# Altium PCB PCB1.PcbDoc
Units mm, origin at the board's own origin, x right, y up, seen from the top; angles counter-clockwise.
Board outline 110 x 69 mm, 2 copper layers (Top Layer, Bottom Layer), stack 1.671 mm thick; 62 components, 63 nets, 264 pads, 198 vias.
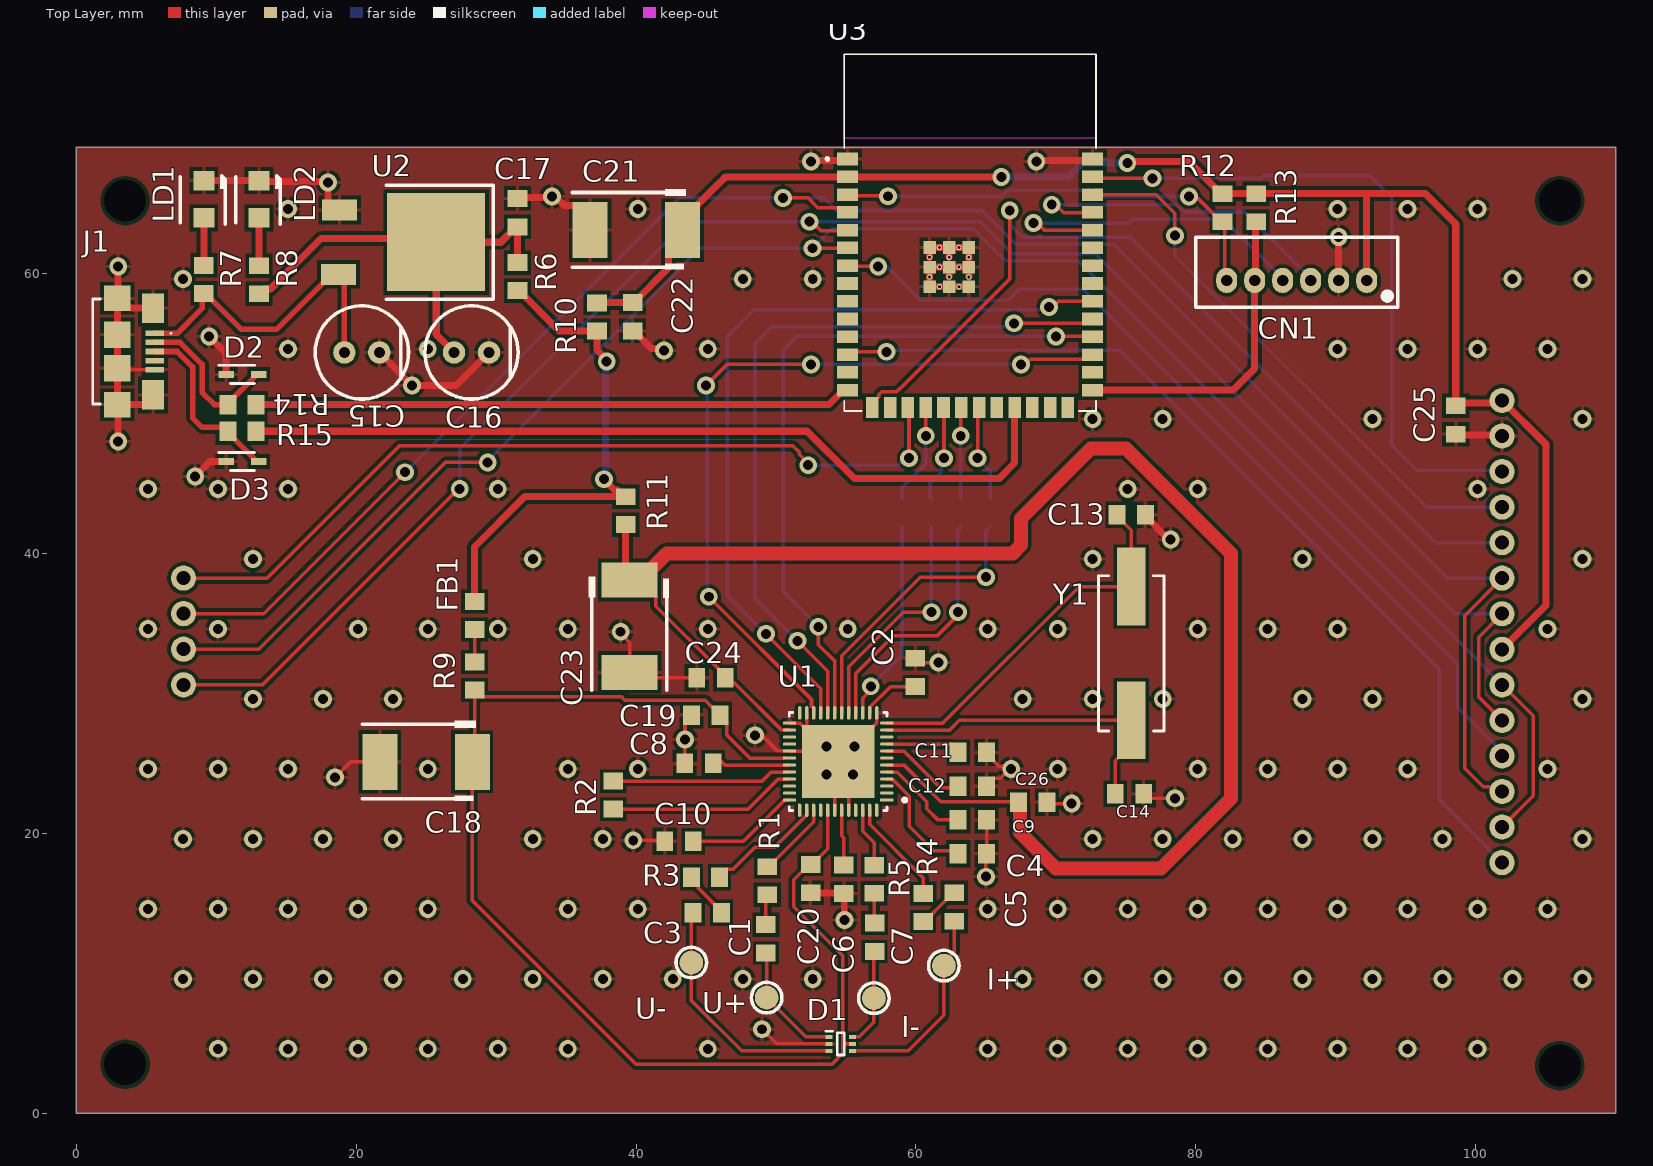
[diagram p0: Top Layer view]
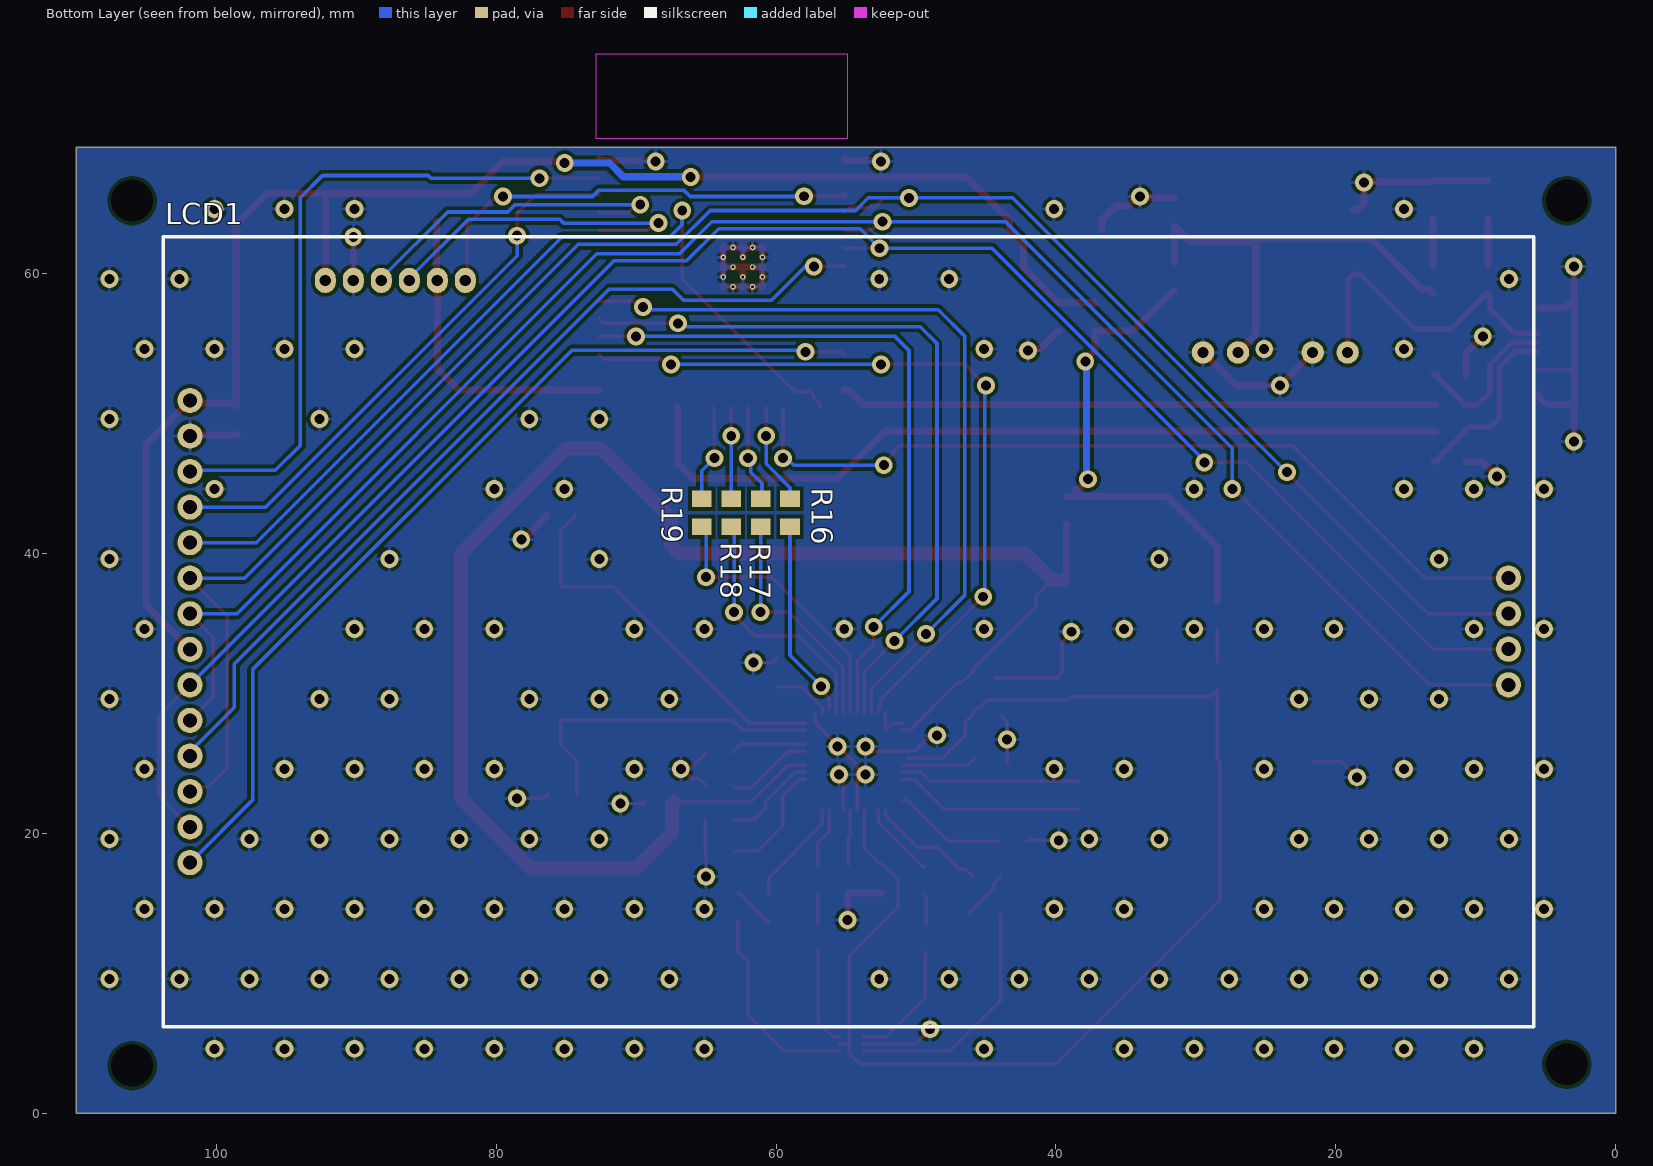
[diagram p1: Bottom Layer view, seen from below]
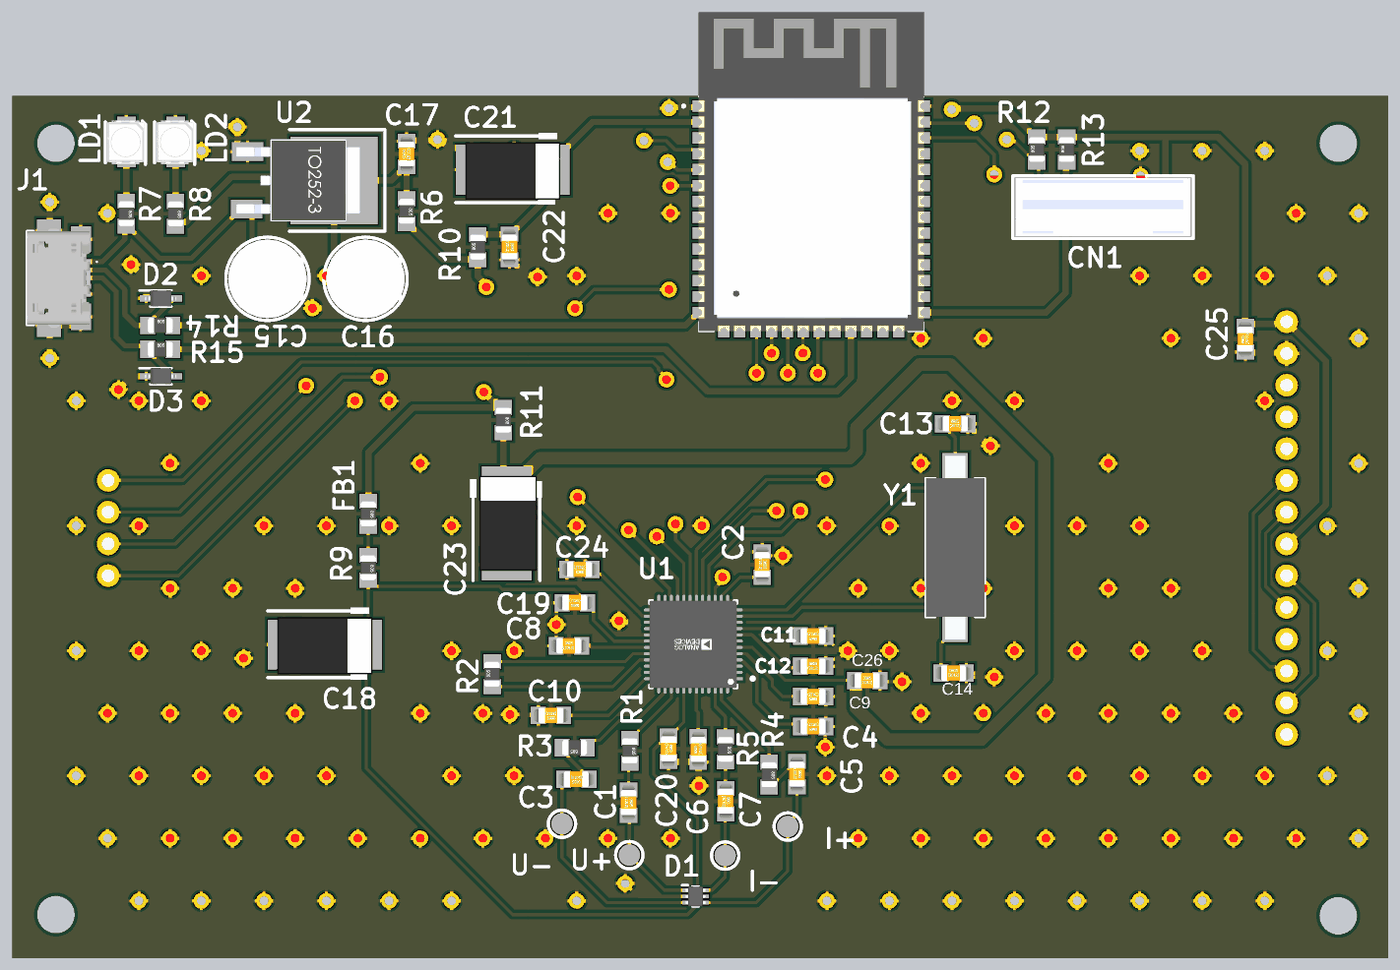
[diagram p2: 3D render of the assembled board from above, using the file's embedded part models]
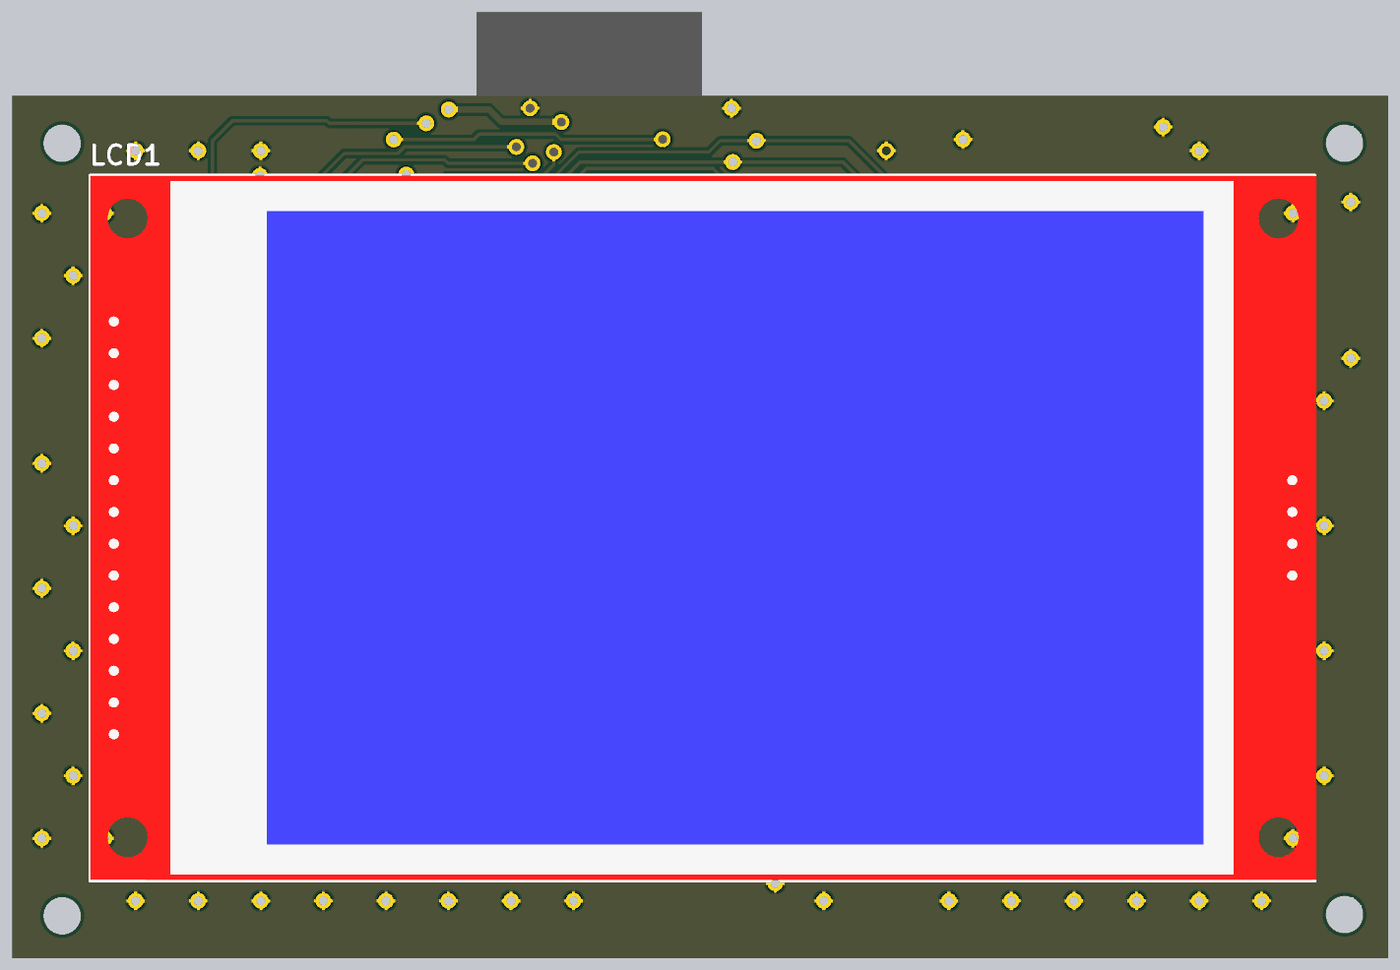
[diagram p3: 3D render of the assembled board from below, using the file's embedded part models]

## Layer stack, top to bottom
Top Solder: solder mask 0.0102, Solder Resist, Dk 3.5
Top Layer: signal copper 0.0356
Dielectric 1: dielectric 1.6, FR-4, Dk 4.8
Bottom Layer: signal copper 0.0356
Bottom Solder: solder mask 0.0102, Solder Resist, Dk 3.5

## Board outline
0,0 0,69 110,69 110,0

## Design rules (kind name [scope] priority, off if disabled: settings)
AssemblyTestPointUsage [All] p1: isadvanced=TRUE
AssemblyTestpoint [All] p1: isadvanced=TRUE testpointundercomponent=TRUE minsize=1.016 maxsize=2.54 preferedsize=1.524 minholesize=0 maxholesize=1.016 preferedholesize=0.813 testpointgrid=0.025 usegrid=TRUE gridtolerance=0 allowsidetop=TRUE allowsidebottom=TRUE
Clearance Clearance_2 [InNamedPolygon('GND_L01_P001') Or InNamedPolygon('GND_L02_P000')] p1: isadvanced=TRUE gap=0.254 ignorepadtopadclearanceinfootprint=FALSE
Clearance Clearance_1 [OnMid vs InNetClass('AD5941') And OnMid] p2: gap=0.1 ignorepadtopadclearanceinfootprint=FALSE sourcerule=52 cellrowname=All cellrowtype=0 cellcolname=AD5941 cellcoltype=2 innerlayers=TRUE
Clearance Clearance_2 [(ExistsOnLayer('Top Layer') Or ExistsOnLayer('Bottom Layer')) vs InNetClass('AD5941') And (ExistsOnLayer('Top Layer') Or ExistsOnLayer('Bottom Layer'))] p3: gap=0.1 ignorepadtopadclearanceinfootprint=FALSE sourcerule=52 cellrowname=All cellrowtype=0 cellcolname=AD5941 cellcoltype=2 outerlayers=TRUE
Clearance Clearance_3 [ vs InNetClass('AD5941')] p4: gap=0.254 ignorepadtopadclearanceinfootprint=FALSE sourcerule=52 cellrowname=All cellrowtype=0 cellcolname=AD5941 cellcoltype=2
Clearance Clearance_1 [InNetClass('USB') And OnMid vs OnMid] p5: gap=0.1 ignorepadtopadclearanceinfootprint=FALSE sourcerule=52 cellrowname=USB cellrowtype=2 cellcolname=All cellcoltype=0 innerlayers=TRUE
Clearance Clearance_2 [InNetClass('USB') And (ExistsOnLayer('Top Layer') Or ExistsOnLayer('Bottom Layer')) vs (ExistsOnLayer('Top Layer') Or ExistsOnLayer('Bottom Layer'))] p6: gap=0.1 ignorepadtopadclearanceinfootprint=FALSE sourcerule=52 cellrowname=USB cellrowtype=2 cellcolname=All cellcoltype=0 outerlayers=TRUE
Clearance Clearance_3 [InNetClass('USB')] p7: gap=0.254 ignorepadtopadclearanceinfootprint=FALSE sourcerule=52 cellrowname=USB cellrowtype=2 cellcolname=All cellcoltype=0
Clearance Clearance_1 [InNetClass('USB') And OnMid vs InNetClass('USB') And OnMid] p8: gap=0.1 ignorepadtopadclearanceinfootprint=FALSE sourcerule=52 cellrowname=USB cellrowtype=2 cellcolname=USB cellcoltype=2 innerlayers=TRUE
Clearance Clearance_2 [InNetClass('USB') And (ExistsOnLayer('Top Layer') Or ExistsOnLayer('Bottom Layer')) vs InNetClass('USB') And (ExistsOnLayer('Top Layer') Or ExistsOnLayer('Bottom Layer'))] p9: gap=0.1 ignorepadtopadclearanceinfootprint=FALSE sourcerule=52 cellrowname=USB cellrowtype=2 cellcolname=USB cellcoltype=2 outerlayers=TRUE
Clearance Clearance_3 [InNetClass('USB') vs InNetClass('USB')] p10: gap=0.254 ignorepadtopadclearanceinfootprint=FALSE sourcerule=52 cellrowname=USB cellrowtype=2 cellcolname=USB cellcoltype=2
Clearance Clearance_1 [OnMid vs OnMid] p11: gap=0.254 ignorepadtopadclearanceinfootprint=FALSE sourcerule=52 cellrowname=All cellrowtype=0 cellcolname=All cellcoltype=0 innerlayers=TRUE
Clearance Clearance_2 [(ExistsOnLayer('Top Layer') Or ExistsOnLayer('Bottom Layer')) vs (ExistsOnLayer('Top Layer') Or ExistsOnLayer('Bottom Layer'))] p12: gap=0.254 ignorepadtopadclearanceinfootprint=FALSE sourcerule=52 cellrowname=All cellrowtype=0 cellcolname=All cellcoltype=0 outerlayers=TRUE
Clearance [All] p13: gap=0.254 ignorepadtopadclearanceinfootprint=FALSE ismatrix=TRUE miname0="All Differential Pairs" mitype0=4 miname1=AD5941 mitype1=2 miname2=USB mitype2=2
ComponentClearance [All] p1: isadvanced=TRUE gap=0.254 collisioncheckmode=3 verticalgap=0.254 showdistances=FALSE
FabricationTestPointUsage [All] p1: isadvanced=TRUE valid=0 allowmultiple=FALSE
FabricationTestpoint [All] p1: isadvanced=TRUE side=3 testpointundercomponent=TRUE minsize=1.016 maxsize=2.54 preferedsize=1.524 minholesize=0 maxholesize=1.016 preferedholesize=0.813 testpointgrid=0.025 allowsidetop=TRUE allowsidebottom=TRUE usegrid=TRUE gridtolerance=0
FanoutControl Fanout_BGA [IsBGA] p1: isadvanced=TRUE bgadir=Out bgaviamode=Centered fanoutstyle=Auto fanoutdirection=Alternating viagrid=0.025 // Fanout_BGA (Default Rule)
FanoutControl Fanout_LCC [IsLCC] p2: isadvanced=TRUE bgadir=Out bgaviamode=Centered fanoutstyle=Auto fanoutdirection=Alternating viagrid=0.025 // Fanout_LCC (Default Rule)
FanoutControl Fanout_SOIC [IsSOIC] p3: isadvanced=TRUE bgadir=Out bgaviamode=Centered fanoutstyle=Auto fanoutdirection=Alternating viagrid=0.025 // Fanout_SOIC (Default Rule)
FanoutControl Fanout_Small [(CompPinCount < 5)] p4: isadvanced=TRUE bgadir=Out bgaviamode=Centered fanoutstyle=Auto fanoutdirection=OutThenIn viagrid=0.025 // Fanout_Small (Default Rule)
FanoutControl Fanout_Default [All] p5: isadvanced=TRUE bgadir=Out bgaviamode=Centered fanoutstyle=Auto fanoutdirection=Alternating viagrid=0.025 // Fanout_Default (Default Rule)
Height [All] p1: isadvanced=TRUE minheight=0 maxheight=25.4 prefheight=12.7
HoleSize [All] p1: isadvanced=TRUE absolutevalues=TRUE maxlimit=10 minlimit=0.025 maxpercent=80.000 minpercent=20.000
HoleToHoleClearance [All] p1: isadvanced=TRUE gap=0.254 allowstackedmicrovias=TRUE
LayerPairs [All] p1: isadvanced=TRUE enforce=TRUE
MinimumSolderMaskSliver [All] p1: isadvanced=TRUE minsoldermaskwidth=0.075
NetAntennae [All] p1: isadvanced=TRUE netantennaetolerance=0
PasteMaskExpansion [All] p1: isadvanced=TRUE expansion=0
PlaneClearance [All] p1: isadvanced=TRUE clearance=0.508
PlaneConnect [All] p1: isadvanced=TRUE planeconnectstyle=Relief reliefexpansion=0.508 reliefentries=4 reliefconductorwidth=0.254 reliefairgap=0.254
PolygonConnect [All] p1: connectstyle=Relief reliefconductorwidth=0.254 reliefentries=4 polygonreliefangle="90 Angle" airgapwidth=0.254
RoutingCorners [All] p1: isadvanced=TRUE cornerstyle=45-Degree minsetback=2.54 maxsetback=2.54
RoutingPriority [All] p1: isadvanced=TRUE routingpriority=0
RoutingVias [All] p1: holewidth=0.711 width=1.27 viastyle="Through Hole" minholewidth=0.711 minwidth=1.27 maxholewidth=0.711 maxwidth=1.27
ShortCircuit [All] p1: isadvanced=TRUE allowed=FALSE
SilkToSilkClearance [All] p1: isadvanced=TRUE silktosilkclearance=0.1
SilkToSolderMaskClearance [IsPad] p1: isadvanced=TRUE minsilkscreentomaskgap=0.1 clearancetoexposedcopper=TRUE
SolderMaskExpansion [All] p1: isadvanced=TRUE expansion=0.102 istentingtop=FALSE
SupplyNets "Schematic Supply Nets_5" [InNet('GND')] p1: isadvanced=TRUE voltage=0.000
SupplyNets "Schematic Supply Nets_4" [InNet('AVDD_AD')] p2: isadvanced=TRUE voltage=0.000
SupplyNets "Schematic Supply Nets_3" [InNet('DVDD_AD')] p3: isadvanced=TRUE voltage=0.000
SupplyNets "Schematic Supply Nets_2" [InNet('+5')] p4: isadvanced=TRUE voltage=0.000
SupplyNets "Schematic Supply Nets_1" [InNet('+3.3')] p5: isadvanced=TRUE voltage=0.000
SupplyNets "Schematic Supply Nets" [InNet('DVDD')] p6: isadvanced=TRUE voltage=0.000
UnRoutedNet [All] p1: isadvanced=TRUE
UnpouredPolygon [All] p1: isadvanced=TRUE
Width [All] p1: maxlimit=1 minlimit=0.1 preferedwidth=0.254 minimp=50.000000 maximp=50.000000 favimp=50.000000
4 further rules are at their usual default settings.

## Classes and differential pairs
net class USB: +5 NetD2_2 NetD3_2
net class AD5941: AD_CS AD_GP0 AD_GP1 AD_GP2 AD_MISO AD_MOSI AD_RESET_N AD_SCLK AIN0 AIN1 AIN3 AVDD_AD AVDD_REG CE0 DE0 DVDD_AD DVDD_REG1V8 GND RCAL0 RCAL1 VBIAS VBIAS_CAP VREF_1V8 VREF_2V5 VZERO XTAL0 XTAL1

## Components (designator, comment, footprint, x,y, rotation, side; value= is the part's Value field where it differs from the comment)
C1 "CAP SMD CER 10UF 50V 1206" CAP0805OK 49.274,12.462 r270 top value=10uF
C2 "CAP SMD CER 470NF 100V 0805" CAP0805OK 59.961,31.496 r270 top value=470nF
C3 "CAP SMD CER 10UF 50V 1206" CAP0805OK 45.09,14.319 r180 top value=10uF
C4 "CAP SMD CER 470NF 100V 0805" CAP0805OK 64.025,18.542 r180 top value=470nF
C5 "CAP SMD CER 10UF 50V 1206" CAP0805OK 62.735,14.734 r270 top value=10uF
C6 "CAP SMD CER 4.7UF 50V 0805" CAP0805OK 54.85,16.716 r90 top value=4.7uF
C7 "CAP SMD CER 10UF 50V 1206" CAP0805OK 57.04,12.573 r270 top value=10uF
C8 "CAP SMD CER 470NF 100V 0805" CAP0805OK 44.5,25 r0 top value=470nF
C9 "CAP SMD CER 470NF 100V 0805" CAP0805OK 64.025,20.955 r180 top value=470nF
C10 "CAP SMD CER 100NF 25V 0805" CAP0805OK 43.07,19.431 r180 top value=100nF
C11 "CAP SMD CER 1UF 10V 0805" CAP0805OK 64.025,25.781 r180 top value=1uF
C12 "CAP SMD CER 100NF 25V 0805" CAP0805OK 64.025,23.368 r0 top value=100nF
C13 "CAP SMD CER 6.8PF 25V 0805" CAP0805OK 75.38,42.759 r0 top value=6.8pF
C14 "CAP SMD CER 100NF 25V 0805" CAP0805OK 75.253,22.82 r0 top value=100nF
C15 "CAP PTH ELE 100UF 25V" CAPELETR11X6.3X2.5 19.159,54.357 r0 top value=100uF
C16 "CAP PTH ELE 100UF 25V" CAPELETR11X6.3X2.5 26.993,54.357 r0 top value=100uF
C17 "CAP SMD CER 100NF 25V 0805" CAP0805OK 31.53,64.345 r90 top value=100nF
C18 "CAP SMD TAN 10UF 25V 2312" CAP2312 25,25 r180 top value=10uF
C19 "CAP SMD CER 100NF 25V 0805" CAP0805OK 44.975,28.448 r180 top value=100nF
C20 "CAP SMD CER 100NF 25V 0805" CAP0805OK 52.468,16.764 r270 top value=100nF
C21 "CAP SMD TAN 10UF 25V 2312" CAP2312 40.022,62.992 r180 top value=10uF
C22 "CAP SMD CER 100NF 25V 0805" CAP0805OK 39.751,56.911 r270 top value=100nF
C23 "CAP SMD TAN 10UF 25V 2312" CAP2312 39.641,34.798 r270 top value=10uF
C24 "CAP SMD CER 100NF 25V 0805" CAP0805OK 45.356,31.115 r180 top value=100nF
C25 "CAP SMD CER 100NF 25V 0805" CAP0805OK 98.569,49.53 r90 top value=100nF
C26 "CAP SMD CER 100NF 25V 0805" CAP0805OK 68.343,22.225 r0 top value=100nF
CN1 "CN MAC 6 VIAS 180º 2.54MM" PHMC4-06 92.2,59.5 r180 top
D1 "SP3004-04XTG" SOTFL50P160X60-6N 54.627,4.953 r0 top
D2 "SD05C-7" SOD2513X120N 11.882,52.789 r0 top
D3 "SD05C-7" SOD2513X120N 11.882,46.566 r0 top
FB1 "FERRITE BEAD SMD 600R 0805" RES0805OK 28.465,35.56 r270 top value="FER BEAD 600R"
I+ "I+" "TEST POINT" 61.993,10.541 r180 top
I- "I-" "TEST POINT" 56.991,8.22 r180 top
J1 "microUSB" MICROUSB 3.738,54.426 r270 top
LCD1 "Display 3,5\"" "DISPLAY_3.5\"_SPI_480X320" 5.771,62.607 r0 bottom locked
LD1 "PLCC-2" PLCC-2 9.126,65.288 r90 top
LD2 "PLCC-2" PLCC-2 13.063,65.288 r90 top
R1 "RES SMD 1K6 0.1% 0805" RES0805OK 49.37,16.605 r270 top value=1K
R2 "RES SMD 1K 1% 0805" RES0805OK 38.371,22.733 r90 top value=1K
R3 "RES SMD 1K6 0.1% 0805" RES0805OK 44.963,16.859 r180 top value=1K
R4 "RES SMD 10R 1% 0805" RES0805OK 60.506,14.696 r270 top value=10R
R5 "RES SMD 10R 1% 0805" RES0805OK 57.009,16.716 r270 top value=10R
R6 "RES SMD 0R 5% 0805" RES0805OK 31.53,59.773 r270 top value=0R
R7 "RES SMD 1K 1% 0805" RES0805OK 9.126,59.573 r270 top value=470
R8 "RES SMD 1K 1% 0805" RES0805OK 13.063,59.557 r270 top value=470
R9 "RES SMD 0R 5% 0805" RES0805OK 28.465,31.242 r270 top value=0R
R10 "RES SMD 0R 5% 0805" RES0805OK 37.211,56.895 r90 top value=0R
R11 "RES SMD 0R 5% 0805" RES0805OK 39.26,43.053 r270 top value=0R
R12 "RES SMD 10K 1% 0805" RES0805OK 81.9,64.7 r90 top value=10K
R13 "RES SMD 10K 1% 0805" RES0805OK 84.3,64.7 r90 top value=10K
R14 "RES SMD 100K 1% 0805" RES0805OK 11.841,50.63 r0 top value=100K
R15 "RES SMD 100K 1% 0805" RES0805OK 11.841,48.725 r0 top value=100K
R16 "RES SMD 10 1% 0805" res0805ok 59,42.9 r270 bottom value=10
R17 "RES SMD 10 1% 0805" res0805ok 61.1,42.9 r270 bottom value=10
R18 "RES SMD 10 1% 0805" res0805ok 63.2,42.9 r270 bottom value=10
R19 "RES SMD 10 1% 0805" res0805ok 65.3,42.9 r270 bottom value=10
U1 "AD5941BCPZ" FP-CP-48-4-IPC_A 54.44,25.126 r180 top
U2 "LM1117" TO252-3 25.723,62.231 r270 top
U3 "IC SMD ESP32-S3-WROOM-1-N4R2" XCVR_ESP32-S3-WROOM-1-N4R2 63.871,62.915 r0 top
U+ "U+" "TEST POINT" 49.331,8.257 r180 top
U- "U-" "TEST POINT" 43.947,10.763 r180 top
Y1 "XTAL SMD 16MHZ" "XTAL SMD 16MHZ" 75.38,32.853 r90 top

## Footprints (in the part's own frame and the unit in brackets; to place one, negate y for a bottom-side part, rotate by r counter-clockwise, add the part's x,y. Pads: shape width x height; smd on the part's side, far side on the other; paste and mask are expansions set on the pad)
CAP0805OK [mm]
  rect 1.2x1.4 smd: 1(-1.016,0) 2(1.016,0)
  body extent -1.4,-0.62 1.4,0.62, height 0.8
CAP2312 [mm]
  rect 2.5x4 smd: 1(-3.3,-0.1) 2(3.3,-0.1)
  silkscreen extent -3.56,-3.05 4.57,2.7, body extent -3.8,-2.3 3.8,2.3, height 3.1
CAPELETR11X6.3X2.5 [mm]
  round 1.6 hole 0.8: 1(0,0) 2(2.5,0)
  silkscreen extent -2.08,-3.33 4.58,3.33, body extent -1.89,-3.15 4.39,3.13, height 11.2
"DISPLAY_3.5\"_SPI_480X320" [mm]
  round 1.8 hole 1: 1(96.1,11.68) 2(96.1,14.22) 3(96.1,16.76) 4(96.1,19.3) 5(96.1,21.84) 6(96.1,24.38) 7(96.1,26.92) 8(96.1,29.46) 9(96.1,32) 10(96.1,34.54) 11(96.1,37.08) 12(96.1,39.62) 13(96.1,42.16) 14(96.1,44.7) 15(1.9,31.995) 16(1.9,29.455) 17(1.9,26.915) 18(1.9,24.375)
  silkscreen extent 0.1,-0.03 98,56.43, body extent 0,0 98,56.34, height 11.7
FP-CP-48-4-IPC_A [mm]
  rect 0.961x0.239 smd paste+0 mask+0: 1(-3.476,2.75)
  rrect100% 0.961x0.239 smd paste+0 mask+0: 2(-3.476,2.25) 3(-3.476,1.75) 4(-3.476,1.25) 5(-3.476,0.75) 6(-3.476,0.25) 7(-3.476,-0.25) 8(-3.476,-0.75) 9(-3.476,-1.25) 10(-3.476,-1.75) 11(-3.476,-2.25) 12(-3.476,-2.75) 25(3.476,-2.75) 26(3.476,-2.25) 27(3.476,-1.75) 28(3.476,-1.25) 29(3.476,-0.75) 30(3.476,-0.25) 31(3.476,0.25) 32(3.476,0.75) 33(3.476,1.25) 34(3.476,1.75) 35(3.476,2.25) 36(3.476,2.75)
  rrect100% 0.239x0.961 smd paste+0 mask+0: 13(-2.75,-3.476) 14(-2.25,-3.476) 15(-1.75,-3.476) 16(-1.25,-3.476) 17(-0.75,-3.476) 18(-0.25,-3.476) 19(0.25,-3.476) 20(0.75,-3.476) 21(1.25,-3.476) 22(1.75,-3.476) 23(2.25,-3.476) 24(2.75,-3.476) 37(2.75,3.476) 38(2.25,3.476) 39(1.75,3.476) 40(1.25,3.476) 41(0.75,3.476) 42(0.25,3.476) 43(-0.25,3.476) 44(-0.75,3.476) 45(-1.25,3.476) 46(-1.75,3.476) 47(-2.25,3.476) 48(-2.75,3.476)
  rect 5.2x5.2 smd paste-1000 mask+0: 49(0,0)
  silkscreen extent -4.88,-3.5 3.5,3.5, body extent -4.46,-4.46 4.46,4.46, height 0.25
MICROUSB [mm]
  rect 0.4x1.35 smd: 1(-1.3,1.875) 2(-0.65,1.875) 3(0,1.875) 4(0.65,1.875) 5(1.3,1.875)
  rect 2.1x1.6 smd: MP1(-3.1,1.75) MP2(3.1,1.75)
  rect 1.8x1.9 smd: MP3(-3.8,-0.8) MP6(3.8,-0.8)
  rect 1.9x1.9 smd: MP4(-1.2,-0.8) MP5(1.2,-0.8)
  silkscreen extent -3.75,-2.55 3.75,3.08, body extent -3.96,-2.55 3.96,2.55, height 2.77
PHMC4-06 [mm]
  oval 1.5x1.8 hole 0.8: 1(0,0) 2(2,0) 3(4,0) 4(6,0) 5(8,0) 6(10,0)
  silkscreen extent -2.21,-3.1 12.22,1.91, body extent -2,-2.93 12,1.72, height 6.02
PLCC-2 [mm]
  rect 1.4x1.5 smd: 1(-1.321,0) 2(1.346,0)
  silkscreen extent -1.78,-1.52 1.7,1.68, body extent -1.75,-1.43 1.75,1.53, height 1.75
RES0805OK [mm]
  rect 1.2x1.4 smd: 1(-1,0) 2(1,0)
  body extent -1,-0.62 1,0.63, height 0.78
res0805ok [mm]
  rect 1.2x1.4 smd: 1(-1,0) 2(1,0)
  body extent -1,-0.62 1,0.63, height 0.78
SOD2513X120N [mm]
  rect 1.075x0.5 smd: 1(-1.162,0) 2(1.162,0)
  silkscreen extent -1.7,-0.65 0.85,0.65, body extent -1.25,-0.65 1.25,0.65, height 1.2
SOTFL50P160X60-6N [mm]
  rect 0.475x0.3 smd: 1(-0.838,0.5) 2(-0.838,0) 3(-0.838,-0.5) 4(0.838,-0.5) 5(0.838,0) 6(0.838,0.5)
  silkscreen extent -1.07,-0.8 0.25,0.9, body extent -0.8,-0.8 0.8,0.8, height 0.6
"TEST POINT" [mm]
  round 1.7 smd: 0(0,0)
  silkscreen extent -1.09,-1.09 1.09,1.09
TO252-3 [mm]
  rect 1.5x2.5 smd: 1(-2.3,-6.9) 3(2.3,-6.985)
  rect 7x7 smd: 2(0,0)
  silkscreen extent -4.06,-3.56 4.06,4.06, body extent -3.29,-7.81 3.29,2.1, height 2.29
XCVR_ESP32-S3-WROOM-1-N4R2 [mm]
  rect 1.5x0.9 smd: 1(-8.75,5.26) 2(-8.75,3.99) 3(-8.75,2.72) 4(-8.75,1.45) 5(-8.75,0.18) 6(-8.75,-1.09) 7(-8.75,-2.36) 8(-8.75,-3.63) 9(-8.75,-4.9) 10(-8.75,-6.17) 11(-8.75,-7.44) 12(-8.75,-8.71) 13(-8.75,-9.98) 14(-8.75,-11.25) 27(8.75,-11.25) 28(8.75,-9.98) 29(8.75,-8.71) 30(8.75,-7.44) 31(8.75,-6.17) 32(8.75,-4.9) 33(8.75,-3.63) 34(8.75,-2.36) 35(8.75,-1.09) 36(8.75,0.18) 37(8.75,1.45) 38(8.75,2.72) 39(8.75,3.99) 40(8.75,5.26)
  rect 0.9x1.5 smd: 15(-6.985,-12.5) 16(-5.715,-12.5) 17(-4.445,-12.5) 18(-3.175,-12.5) 19(-1.905,-12.5) 20(-0.635,-12.5) 21(0.635,-12.5) 22(1.905,-12.5) 23(3.175,-12.5) 24(4.445,-12.5) 25(5.715,-12.5) 26(6.985,-12.5)
  rect 0.9x0.9 smd: 41_1(-1.5,-2.46) 41_2(-2.9,-2.46) 41_3(-0.1,-2.46) 41_4(-2.9,-3.86) 41_5(-1.5,-3.86) 41_6(-0.1,-3.86) 41_7(-2.9,-1.06) 41_8(-1.5,-1.06) 41_9(-0.1,-1.06)
  round 0.4 hole 0.2 mask+0: 41_10(-1.5,-1.76) 41_11(-2.9,-1.76) 41_12(-0.1,-1.76) 41_13(-2.9,-3.16) 41_14(-1.5,-3.16) 41_15(-0.1,-3.16) 41_16(-2.2,-1.06) 41_17(-0.8,-1.06) 41_18(-2.2,-2.46) 41_19(-0.8,-2.46) 41_20(-2.2,-3.86) 41_21(-0.8,-3.86)
  Keep-Out Layer region: 9,6.75 -9,6.75 -9,12.75 9,12.75
  Keep-Out Layer region: 9,6.75 -9,6.75 -9,12.75 9,12.75
  silkscreen extent -10.3,-12.75 9,12.75, body extent -9,-12.75 9,12.75, height 3.25
"XTAL SMD 16MHZ" [mm]
  rect 5.55x2.05 smd: 1(-4.775,0) 2(4.775,0)
  silkscreen extent -5.55,-2.35 5.55,2.35, body extent -7.34,-2.35 7.34,2.35, height 4.6

## Part data
C1 C3 C5 C7: library part "CAP SMD CER 10UF 10V 0805", "Multilayer Ceramic Capacitors MLCC - SMD/SMT 10 uF 10 VDC 10% 0805 X7R", Tolerance=20%, Voltage=50V, COD. CRISTOFOLI=EMP.00322, List="CAP CER 10UF 50V X5R 1206/UMK316BBJ106ML-T/Generic", Type=CERAMIC
C2 C4 C8 C9: Tolerance=10%, Voltage=100V, COD. CRISTOFOLI=EMP.00245, List="CAP CER 0.47UF 100V 10% X7R 0805/GRM21BR72A474KA73L/Murata Electronics North America", Type=CERAMIC
C6: Tolerance=10%, Voltage=50V, COD. CRISTOFOLI=EMP.00333, List="CAP CER 4.7UF 50V X5R 0805/CL21A475KBQNNNE/Samsung", Type=CERAMIC
C10 C12 C14 C17 C19 C20 C22 C24 C25 C26: Tolerance=10%, Voltage=25V, COD. CRISTOFOLI=EMP.00094, List="CAP CER 0.1UF 25V 10% X7R 0805/CGJ4J2X7R1E104K125AA/TDK", Type=CERAMIC
C11: Tolerance=20%, Voltage=10V, COD. CRISTOFOLI=EMP.00209, List="CAP- SMD/SMT X7R 0805 10V 1uF 20%/LMK212BJ105MG-T/Taiyo Yuden", Type=CERAMIC
C13: library part "CAP SMD CER 100NF 25V 0805", Tolerance=10%, Voltage=25V, COD. CRISTOFOLI=EMP.00094, List="CAP CER 0.1UF 25V 10% X7R 0805/CGJ4J2X7R1E104K125AA/TDK", Type=CERAMIC
C15 C16 C18 C21 C23: Tolerance=20%, Voltage=25V
  C15 C16: COD. CRISTOFOLI=EMP.00025, List="CAP ALUM 100UF 25V 20% RADIAL - ECA-1EM101I", Type="ALUMINIUM ELETROLITHIC"
  C18 C21 C23: COD. CRISTOFOLI=EMP.00040, List="CAP TANT 10UF 25V 20% 2312 / 293D106X0025C2TE3 / Vishay", Type=TANTALUM
CN1: "gravação micro", Manufacturer=METALTEX, Manufacturer Part Number=PHMC4-06, COD. CRISTOFOLI=EMP.00436, List="Barra de pinos Macho 180° / BPSC-03 / metaltex"
D1: "TVS Diode (Uni-directional)", Manufacturer_Name=LITTELFUSE, Mouser Part Number=576-SP3004-04XTG, Arrow Part Number=SP3004-04XTG, Arrow Price/Stock=https://www.arrow.com/en/products/sp3004-04xtg/littelfuse?region=nac, Datasheet Link=https://m.littelfuse.com/~/media/electronics/datasheets/tvs_diode_arrays/littelfuse_tvs_diode_array_sp3004_datasheet.pdf.pdf, Height=0.6mm, Manufacturer_Part_Number=SP3004-04XTG, Mouser Price/Stock=https://www.mouser.co.uk/ProductDetail/Littelfuse/SP3004-04XTG?qs=trbuaetfxXQ7JjseAkJ3Ww%3D%3D
D2 D3: "TVS Diode (Bi-directional)", Manufacturer_Name="Diodes Incorporated", Mouser Part Number=621-SD05C-7, Arrow Part Number=SD05C-7, Arrow Price/Stock=https://www.arrow.com/en/products/sd05c-7/diodes-incorporated?utm_currency=USD&region=nac, Datasheet Link=https://www.diodes.com//assets/Datasheets/SD05C.pdf, Height=1.2mm, Manufacturer_Part_Number=SD05C-7, Mouser Price/Stock=https://www.mouser.co.uk/ProductDetail/Diodes-Incorporated/SD05C-7?qs=lQAVKuKFhkJ%252Bbajm903DcQ%3D%3D
I+ I- U+ U-: library part "TEST POINT"
J1: "Connector", Arrow Part Number=10118192-0002LF, Manufacturer_Name="Amphenol Communications Solutions", Arrow Price/Stock=https://www.arrow.com/en/products/10118192-0002lf/amphenol-fci?utm_currency=USD&region=nac, Datasheet Link=https://cdn.amphenol-cs.com/media/wysiwyg/files/drawing/10118192.pdf, Height=3.08mm, Manufacturer_Part_Number=10118192-0002LF
LCD1: library part "Display 3,5\" SPI", "Display TFT SPI 480X320", COD. CRISTOFOLI=EMP.00435, Datasheet=http://www.lcdwiki.com/res/MSP3520/3.5inch_SPI_Module_MSP3520_User_Manual_EN.pdf, Documentações=http://www.lcdwiki.com/3.5inch_SPI_Module_ILI9488_SKU:MSP3520, List="Display TFT 3.5\" SPI 480X320 MSP3520"
LD1 LD2: library part "LED branco /67-21S/KK5C-H6565N32P02833Z6/2T(EMM)/Everlight", COD. CRISTOFOLI=EMP.00388, List="LED branco /67-21S/KK5C-H6565N32P02833Z6/2T(EMM)/Everlight"
R1 R2 R3: Tolerance=0.1%
  R1 R3: COD. CRISTOFOLI=EMP.00204, List="RES 1.6K OHM 1/8W .1% 0805 SMD/ERA-6AEB162V/Panasonic Electronic Components/Generic"
  R2: COD. CRISTOFOLI=EMP.50098, List="RES SMD 1K 1% 0805"
R4 R5 R7 R8 R12 R13: Tolerance=1%
  R4 R5: COD. CRISTOFOLI=EMP.50001, List="RES SMD 10R 1% 0805"
  R7 R8: COD. CRISTOFOLI=EMP.50098, List="RES SMD 1K 1% 0805"
  R12 R13: COD. CRISTOFOLI=EMP.50116, List="RES SMD 10K 1% 0805"
R6 R9 R10 R11: Tolerance=5%, COD. CRISTOFOLI=EMP.00109, List="RES 0.0 OHM 1/8W JUMP 0805 SMD/ERJ-6GEY0R00V/Panasonic Electronic Components"
R14 R15 R16 R17 R18 R19: library part "RES SMD 10K 1% 0805", Tolerance=1%, COD. CRISTOFOLI=EMP.50116, List="RES SMD 10K 1% 0805"
U1: library part CMP-09085-000021-2, "BIO-IMPEDANCE & ELECTROCHEMICAL", RoHS Compliant=Yes
U2: library part "IC SMD REG LM1117 TO252", "800mA Low-Dropout Linear Regulator", Manufacturer="Texas Instruments", Voltage="1.8 A 5V", COD. CRISTOFOLI=EMP.50030, List="IC SMD REG LM1117 TO252"
U3: "Bluetooth, WiFi 802.11b/g/n, Bluetooth v5.0 Transceiver Module 2.4GHz PCB Trace Surface Mount", Package=None, Availability="In Stock", Check_prices=https://www.snapeda.com/parts/ESP32-S3-WROOM-1-N4R2/Espressif+Systems/view-part/?ref=eda, COD. CRISTOFOLI=EMP.50161, List="IC SMD ESP32-S3-WROOM-1-N4R2", MF="Espressif Systems", MP=ESP32-S3-WROOM-1-N4R2, Price=None, Purchase-URL=https://pricing.snapeda.com/search/part/ESP32-S3-WROOM-1-N4R2/?ref=eda, SnapEDA_Link=https://www.snapeda.com/parts/ESP32-S3-WROOM-1-N4R2/Espressif+Systems/view-part/?ref=snap
Y1: "Crystal or Oscillator", Arrow Part Number=XT9M20ANA16M, Manufacturer_Name=Vishay, Mouser Part Number=73-XT49M1600-20, Arrow Price/Stock=https://www.arrow.com/en/products/xt9m20ana16m/vishay?region=nac, Datasheet Link=https://componentsearchengine.com/Datasheets/5/XT9M20ANA16M.pdf, Height=4.5mm, Manufacturer_Part_Number=XT9M20ANA16M, Mouser Price/Stock=https://www.mouser.co.uk/ProductDetail/Vishay-Dale/XT9M20ANA16M?qs=NVJATC80C4%252B3oEpMmPFr7g%3D%3D
FB1: COD. CRISTOFOLI=EMP.00336, List="FERRITE BEAD 600 OHM 0805/HZ0805E601R-10/Laird"

## Free pads (board coordinates)
  round 1.524 hole 3 unplated: 2(3.5,3.5) 2(3.5,65.2) 2(106,3.4) 2(106,65.2)

## Via types
v1: diameter 1.27, hole 0.711, Top Layer to Bottom Layer, 198 vias

## Nets (pads, with @x,y where several pads share a name; then routed paths per layer and width w, separated by ;. In a path a pad name is that pad's centre, name@x,y a point inside that pad or via, vN(x,y) a via of type N, cw(c..) or ccw(c..) an arc to the next point about the centre after c; other vN are vias at no path point)
3V3_OUT: C16.1 C17.1 R6.1 R8.2 U2.2 | length 31.6
  Top Layer w0.508: R8.2 13.409,58.903 13.903,58.903 17.5,62.5 25.454,62.5 U2.2 ; C16.1 25.723,55.627 U2.2 ; R6.1 C17.1 31.43,63.329 30.332,62.231 U2.2
+3.3: FB1.1 R6.2 R10.1 R11.1 | length 35.3
  Top Layer w0.5: R10.1 37.211,54.545 37.9,53.856 v1(37.9,53.7) ; v1(37.7,45.3) 38.474,44.526 R11.1@38.687,44.526
  Top Layer w0.508: FB1.1 28.465,40.465 32.053,44.053 R11.1 ; R6.2 31.63,58.773 34.508,55.895 R10.1
  Bottom Layer w0.5: v1(37.7,45.3) 37.8,45.4 37.8,53.6 v1(37.9,53.7)
+5: C15.1 J1.1 R7.2 U2.3 | length 23.3
  Top Layer w0.4: J1.1 7.226,55.726 9,57.5 9,58.447 R7.2 9.226,58.573 11.799,56 14.307,56 18.238,59.931 U2.3 19.159,59.51 C15.1
AD_CS: R16.2 U1.15 | length 14.1
  Top Layer w0.254: U1.15@56.19,28.955 56.19,29.648 56.775,30.233 v1(56.775,30.5)
  Bottom Layer w0.254: v1(56.775,30.5) 59,32.725 R16.2
AD_GP0: U1.19 U3.30 | length 50
  Top Layer w0.254: v1(53.025,34.75) 53.025,33.475 54.19,32.31 U1.19 ; v1(70,55.5) 72.596,55.5 U3.30
  Bottom Layer w0.254: v1(53.025,34.75) 50.5,37.275 50.5,54.5 51.5,55.5 v1(70,55.5)
AD_GP1: U1.20 U3.31 | length 53.4
  Top Layer w0.254: v1(51.525,33.75) 53.69,31.585 U1.20 ; v1(67,56.438) 72.314,56.438 U3.31
  Bottom Layer w0.254: v1(51.525,33.75) 48.5,36.775 48.5,55 49.7,56.2 66.343,56.2 66.387,56.244 66.806,56.244 v1(67,56.438)
AD_GP2: U1.21 U3.32 | length 56.8
  Top Layer w0.254: v1(49.275,34.25) 53.19,30.335 U1.21 ; v1(69.5,57.6) 69.775,57.6 70.175,58 72.606,58 U3.32
  Bottom Layer w0.254: v1(49.275,34.25) 46.5,37.025 46.5,55.5 48.4,57.4 68.843,57.4 68.849,57.406 69.306,57.406 v1(69.5,57.6)
AD_MISO: R19.2 U1.18 | length 20.4
  Top Layer w0.254: U1.18 54.69,32.69 60.3,38.3 v1(65,38.3)
  Bottom Layer w0.254: v1(65,38.3) 65,41.6 R19.2
AD_MOSI: R17.2 U1.17 | length 16.9
  Top Layer w0.254: U1.17 55.19,31.89 59.1,35.8 v1(61.1,35.8)
  Bottom Layer w0.254: v1(61.1,35.8) R17.2
AD_RESET_N: U1.22 U3.29 | length 55.1
  Top Layer w0.254: v1(45,52) 46.5,53.5 v1(52.5,53.5) ; v1(45.2,36.9) 52.537,29.563 52.537,29.101 52.69,28.948 U1.22 ; v1(67.5,53.5) 67.775,53.5 68.157,53.882 72.298,53.882 U3.29
  Bottom Layer w0.254: v1(45,52) 45.1,51.9 45.1,37 v1(45.2,36.9) ; v1(52.5,53.5) v1(67.5,53.5)
AD_SCLK: R18.2 U1.16 | length 18.2
  Top Layer w0.254: U1.16 55.69,31.415 58.375,34.1 61.5,34.1 63,35.6 v1(63,35.8)
  Bottom Layer w0.254: v1(63,35.8) 63,41.7 R18.2
AIN0: R1.1 U1.39 | length 5.5
  Top Layer w0.254: R1.1 49.47,17.605 52.69,20.825 U1.39
AIN1: R3.1 U1.38 | length 8.5
  Top Layer w0.254: R3.1 45.963,16.959 46.436,17.432 46.932,17.432 48.5,19 49.891,19 52.037,21.146 52.037,21.151 52.19,21.304 U1.38
AIN3: C10.1 U1.36 | length 8.1
  Top Layer w0.254: C10.1 47.673,19.431 50.618,22.376 U1.36
AVDD_AD: C18.1 C19.1 C20.1 D1.5 R9.2 U1.30 U1.41 | length 92.2
  Top Layer w0.254: U1.30@50.611,25.376 48.124,25.376 46.464,27.036 46.464,27.975 C19.1 45.991,28.548 45.518,29.021 45.418,29.021 44.939,29.5 39.2,29.5 38.931,29.769 28.938,29.769 R9.2 28.465,25.265 C18.1 28.3,15.2 40,3.5 54,3.5 54.775,4.275 54.775,4.75 ; U1.41 53.69,18.902 52.568,17.78 C20.1 52.368,17.78 51.275,16.687 51.275,14.75 54.775,11.25 54.775,4.75 ; D1.5 54.978,4.953 54.775,4.75
AVDD_REG: C9.2 U1.5 | length 6.8
  Top Layer w0.254: U1.5 57.923,24.369 58.656,24.369 60.775,22.25 60.775,21.75 61.57,20.955 C9.2
CE0: R4.1 U1.47 | length 7.5
  Top Layer w0.254: U1.47 56.69,20.645 60.506,16.829 R4.1
DE0: R5.1 U1.46 | length 4.3
  Top Layer w0.254: U1.46 56.19,20.156 57.009,19.337 R5.1
DVDD: C21.1 C22.1 C25.2 CN1.1 LCD1.1 LCD1.8 R10.2 R12.2 R13.2 U3.2 | length 111.8
  Top Layer w0.508: R10.2 37.227,57.911 39.735,57.911 C22.1 39.851,57.927 42.326,60.402 42.326,62.096 C21.1 43.322,63.842 45.98,66.5 46,66.5 46.405,66.905 U3.2 55.123,66.903 66.098,66.903 v1(66.1,66.9) ; v1(75.1,67.9) 75.2,68 79.5,68 81.8,65.7 R13.2 92.2,65.7 ; CN1.1 92.2,65.7 ; LCD1.8 105,36.276 105,47.798 LCD1.1 101.68,50.736 98.759,50.736 C25.2 98.569,63.531 96.4,65.7 92.2,65.7
  Bottom Layer w0.508: v1(66.1,66.9) 66.111,66.911 70.911,66.911 71.9,67.9 v1(75.1,67.9)
DVDD_AD: C23.1 C24.1 C26.1 R11.2 U1.6 U1.26 | length 118.8
  Top Layer w0.254: C23.1@40.291,38.098 41.414,36.975 41.414,36.225 45.899,31.74 45.899,31.588 C24.1 46.737,30.75 47.025,30.75 50.392,27.383 50.957,27.383 U1.26 ; U1.6 59.149,24.876 61.775,22.25 C26.1@67.275,22.25
  Top Layer w0.5: C23.1@39.26,38.379 R11.2
  Top Layer w1: C23.1 40.291,38.098 42.193,40 66.914,40 67.5,40.586 67.5,42.5 72.5,47.5 75,47.5 82.5,40 82.5,22.5 77.5,17.5 70,17.5 67.427,20.073 67.427,22.098 C26.1@67.275,22.25
DVDD_REG1V8: C2.2 U1.14 | length 4.3
  Top Layer w0.254: U1.14 56.697,28.609 56.697,28.995 58.182,30.48 C2.2
EN: CN1.6 R12.1 U3.3 | length 32.3
  Top Layer w0.254: U3.3@55.188,65.567 57.949,65.567 v1(58,65.516) ; v1(79.5,65.5) 79.646,65.354 80.146,65.354 81.8,63.7 R12.1 82.05,63.55 82.05,59.65 CN1.6
  Top Layer w0.508: U3.3 U3.3@55.188,65.567
  Bottom Layer w0.254: v1(58,65.516) 58.016,65.5 66.137,65.5 66.569,65.932 72.681,65.932 73.113,65.5 v1(79.5,65.5)
GND: C2.1 C4.1 C6.1 C8.1 C9.1 C10.2 C11.1 C12.2 C13.2 C14.2 C15.2 C16.2 C17.2 C18.2 C19.2 C20.2 C21.2 C22.2 C23.2 C24.2 C25.1 C26.2 CN1.2 D1.2 D2.1 D3.1 J1.5 J1.MP1 J1.MP2 J1.MP3 J1.MP4 J1.MP5 J1.MP6 LCD1.2 LD1.2 LD2.2 U1.13 U1.23 U1.25 U1.29 U1.42 U1.44 U1.49 U2.1 U3.1 U3.40 U3.41_1 U3.41_2 U3.41_3 U3.41_4 U3.41_5 U3.41_6 U3.41_7 U3.41_8 U3.41_9 U3.41_10 U3.41_11 U3.41_12 U3.41_13 U3.41_14 U3.41_15 U3.41_16 U3.41_17 U3.41_18 U3.41_19 U3.41_20 U3.41_21 | length 149.9
  Top Layer w0.254: J1.MP5 3.038,53.126 J1.5 ; v1(18.5,24) 19.6,25.1 C18.2 ; v1(38.9,34.4) 38.9,34.245 39.541,33.604 C23.2 39.924,31.115 C24.2 ; v1(39.8,19.5) 41.985,19.5 C10.2 ; C8.1 43.484,26.711 C19.2@43.484,27.873 ; v1(43.5,26.7) 43.511,26.711 43.511,28 C19.2 ; v1(48.5,27) 48.694,26.806 49.181,26.806 50.103,25.883 50.957,25.883 U1.29 U1.49@53.69,25.876 ; v1(49,6) 50.047,4.953 D1.2 ; U1.25 51.69,27.876 52.19,27.376 U1.23 ; U1.42 54.19,24.876 U1.49 57.19,27.876 U1.13 ; U1.44 U1.49@55.19,24.376 ; C2.1 60.273,32.2 v1(61.6,32.2) ; v1(65,16.9) 65,18.501 C4.1 C9.1 ; C12.2 65.041,23.468 65.514,23.941 66.022,23.941 66.681,24.6 v1(66.8,24.6) 66.606,24.794 65.928,24.794 65.041,25.681 C11.1 ; C26.2 69.457,22.127 v1(71.127,22.127) ; C14.2 76.589,22.5 v1(78.5,22.5)
  Top Layer w0.5: v1(3,48) 3,50.564 J1.MP6 ; v1(3,60.5) 3,58.288 J1.MP3 ; J1.MP2 5.488,51.176 4.938,50.626 J1.MP6 ; J1.MP1 3.938,57.526 3.888,57.576 3.588,57.576 J1.MP3 ; v1(8.5,45.5) 9.566,46.566 D3.1 ; LD1.2 LD2.2 13.13,66.567 17.933,66.567 v1(18,66.5) 18,65.031 18.5,64.531 U2.1 ; v1(9.5,55.5) 10.72,54.28 D2.1 ; C15.2 21.659,54.349 24,52.008 v1(24,52) 27.136,52 C16.2 ; C17.2 31.599,65.43 33.93,65.43 v1(34,65.5) 34.208,65.5 34.866,64.842 35.722,64.842 36.722,63.842 C21.2 ; C22.2 39.851,55.895 41.099,54.647 41.853,54.647 v1(42,54.5) ; C20.2 52.492,15.724 54.826,15.724 C6.1 54.875,15.675 54.875,13.825 v1(54.9,13.8) ; v1(52.5,68) 52.587,68.087 55.033,68.087 U3.1 ; U3.41_11 U3.41_7 U3.41_16 U3.41_8 ; U3.41_14 U3.41_1 ; U3.41_10 U3.41_8 ; U3.41_6 U3.41_21 U3.41_5 U3.41_20 U3.41_4 U3.41_13 U3.41_2 U3.41_18 U3.41_1 ; U3.41_15 U3.41_3 ; v1(68.6,68) 68.687,68.087 72.533,68.087 U3.40 ; C13.2 76.396,42.659 78.055,41 v1(78.2,41) ; CN1.2 v1(90.2,62.6) ; C25.1@98.512,48.457 C25.1 98.632,48.45 101.807,48.45 LCD1.2 ; J1.MP6 J1.MP5 J1.MP4 J1.MP3 ; U3.41_1 U3.41_19 U3.41_3 ; U3.41_8 U3.41_17 U3.41_9 U3.41_12 U3.41_3
  other v1: 10.125,4.6 15.125,4.6 20.125,4.6 25.125,4.6 30.125,4.6 35.125,4.6 45.125,4.6 65.125,4.6 70.125,4.6 75.125,4.6 80.125,4.6 85.125,4.6 90.125,4.6 95.125,4.6 100.125,4.6 7.625,9.6 12.625,9.6 17.625,9.6 22.625,9.6 27.625,9.6 32.625,9.6 37.625,9.6 42.625,9.6 47.625,9.6 52.625,9.6 67.625,9.6 72.625,9.6 77.625,9.6 82.625,9.6 87.625,9.6 92.625,9.6 97.625,9.6 102.625,9.6 107.625,9.6 5.125,14.6 10.125,14.6 15.125,14.6 20.125,14.6 25.125,14.6 35.125,14.6 40.125,14.6 65.125,14.6 70.125,14.6 75.125,14.6 80.125,14.6 85.125,14.6 90.125,14.6 95.125,14.6 100.125,14.6 105.125,14.6 7.625,19.6 12.625,19.6 17.625,19.6 22.625,19.6 32.625,19.6 37.625,19.6 72.625,19.6 77.625,19.6 82.625,19.6 87.625,19.6 92.625,19.6 97.625,19.6 107.625,19.6 53.6,24.2 55.5,24.2 5.125,24.6 10.125,24.6 15.125,24.6 25.125,24.6 35.125,24.6 40.125,24.6 70.125,24.6 80.125,24.6 85.125,24.6 90.125,24.6 95.125,24.6 105.125,24.6 53.6,26.2 55.6,26.2 12.625,29.6 17.625,29.6 22.625,29.6 67.625,29.6 72.625,29.6 77.625,29.6 87.625,29.6 92.625,29.6 107.625,29.6 5.125,34.6 10.125,34.6 20.125,34.6 25.125,34.6 30.125,34.6 35.125,34.6 45.125,34.6 55.125,34.6 65.125,34.6 70.125,34.6 80.125,34.6 85.125,34.6 90.125,34.6 105.125,34.6 12.625,39.6 32.625,39.6 72.625,39.6 87.625,39.6 107.625,39.6 5.125,44.6 10.125,44.6 15.125,44.6 30.125,44.6 75.125,44.6 80.125,44.6 100.125,44.6 72.625,49.6 77.625,49.6 92.625,49.6 107.625,49.6 15.125,54.6 25.125,54.6 45.125,54.6 90.125,54.6 95.125,54.6 100.125,54.6 105.125,54.6 7.625,59.6 47.625,59.6 52.625,59.6 102.625,59.6 107.625,59.6 15.125,64.6 40.125,64.6 90.125,64.6 95.125,64.6 100.125,64.6
I+: C5.2 D1.4 I+.0 | length 14.6
  Top Layer w0.254: D1.4 59.453,4.453 61.993,6.993 I+.0 61.993,10.798 62.735,11.54 C5.2
I-: C7.2 D1.6 I-.0 | length 7
  Top Layer w0.254: D1.6 55.953,5.453 56.989,6.489 56.989,8.218 I-.0 56.991,11.508 C7.2
IO0: CN1.5 R13.1 U3.27 | length 22.8
  Top Layer w0.508: U3.27 82.665,51.665 84.2,53.2 CN1.5 84.25,59.55 84.25,63.65 R13.1
LCD_CLK: LCD1.7 LCD1.10 LCD1.15 U3.5 | length 133.2
  Top Layer w0.254: LCD1.15 13.312,30.612 27.3,44.6 v1(27.4,44.6) ; v1(52.4,63.7) 52.566,63.7 53.202,63.065 55.091,63.065 U3.5 ; LCD1.10 100.2,29.738 100.2,34.016 LCD1.7
  Bottom Layer w0.254: v1(27.4,44.6) 27.4,47.5 43.6,63.7 v1(52.4,63.7) 64.6,63.7 66.892,61.408 71.788,61.408 71.796,61.4 72.8,61.4 98.513,35.687 LCD1.7
LCD_CS: LCD1.3 U3.39 | length 48.5
  Top Layer w0.254: U3.39 72.726,66.8 v1(76.9,66.8)
  Top Layer w0.508: LCD1.3@101.847,45.823 LCD1.3
  Bottom Layer w0.254: v1(76.9,66.8) 84.653,66.8 84.853,67 92.4,67 93.992,65.408 93.992,47.708 95.77,45.93 101.788,45.93 LCD1.3
LCD_MISO: LCD1.9 LCD1.13 LCD1.16 U3.6 | length 134.8
  Top Layer w0.254: LCD1.16 13.033,33.152 26.381,46.5 v1(29.4,46.5) ; v1(52.6,61.8) 55.096,61.8 U3.6 ; LCD1.13 104.1,22.676 104.1,28.4 101.893,30.607 LCD1.9
  Bottom Layer w0.254: v1(29.4,46.5) 29.4,46.637 44.563,61.8 v1(52.6,61.8) 53.992,63.192 64.1,63.192 66.392,60.9 71.578,60.9 LCD1.9
LCD_MOSI: LCD1.6 LCD1.12 LCD1.17 U3.4 | length 140.9
  Top Layer w0.254: LCD1.17 13.392,35.692 v1(23.5,45.8) ; v1(50.5,65.4) 52.28,65.4 52.992,64.688 54.798,64.688 U3.4 ; LCD1.12 101.575,23.283 100.995,23.283 100.949,23.328 100.521,23.328 99.2,24.649 99.2,35.556 LCD1.6
  Bottom Layer w0.254: v1(23.5,45.8) 43.1,65.4 v1(50.5,65.4) 53.399,65.4 54.299,64.5 64.7,64.5 67.124,62.076 74.124,62.076 97.973,38.227 LCD1.6
LCD_RESET: LCD1.4 U3.38 | length 40.3
  Top Layer w0.254: U3.38 77.165,65.635 78.5,64.3 v1(78.5,62.7)
  Bottom Layer w0.254: v1(78.5,62.7) 78.5,61.277 96.47,43.307 LCD1.4
LCD_RS: LCD1.5 U3.15 | length 64.4
  Top Layer w0.254: U3.15 56.886,50.715 57.325,51.154 57.325,51.323 57.548,51.546 58.613,51.546 58.813,51.746 58.846,51.746 66.7,59.6 v1(66.7,64.5)
  Bottom Layer w0.254: v1(66.7,64.5) 66.716,64.484 66.716,63.484 67.616,62.584 75.316,62.584 97.133,40.767 LCD1.5
NetC1_1: C1.1 R1.2 | length 2.2
  Top Layer w0.254: C1.1 49.274,15.509 R1.2
NetC3_1: C3.1 R3.2 | length 3.4
  Top Layer w0.254: R3.2 44.436,16.386 44.436,16.089 46.106,14.419 C3.1
NetC5_1: C5.1 R4.2 | length 3.1
  Top Layer w0.254: R4.2 60.606,13.696 62.162,15.252 62.162,15.277 62.635,15.75 C5.1
NetC7_1: C7.1 R5.2 | length 2.1
  Top Layer w0.254: R5.2 57.009,13.62 C7.1
NetD2_2: D2.2 J1.2 R14.1 | length 11.5
  Top Layer w0.4: J1.2 7.424,55.076 9,53.5 9,51.5 9.87,50.63 R14.1 10.841,50.73 12.76,52.65 12.76,52.785 12.764,52.789 D2.2
NetD3_2: D3.2 J1.3 R15.1 | length 13
  Top Layer w0.4: J1.3 7.214,54.426 8.32,53.32 8.32,49.68 9,49 10.566,49 R15.1 10.841,48.625 12.76,46.706 12.76,46.57 12.764,46.566 D3.2
NetFB1_2: FB1.2 R9.1 | length 2.3
  Top Layer w0.254: R9.1 FB1.2
NetLD1_1: LD1.1 R7.1 | length 3.4
  Top Layer w0.5: R7.1 LD1.1
NetLD2_1: LD2.1 R8.1 | length 3.4
  Top Layer w0.5: R8.1 LD2.1
NetR16_1: R16.1 U3.18 | length 7.2
  Top Layer w0.254: U3.18 60.7,50.411 v1(60.7,48.4)
  Bottom Layer w0.254: R16.1 59,44.7 60.7,46.4 v1(60.7,48.4)
NetR17_1: R17.1 U3.19 | length 7
  Top Layer w0.254: U3.19 62,50.381 v1(62,46.8)
  Bottom Layer w0.254: R17.1 61,44 61,45 61.806,45.806 61.806,46.606 v1(62,46.8)
NetR18_1: R18.1 U3.20 | length 6.5
  Top Layer w0.254: v1(63.2,48.4) 63.2,50.379 U3.20
  Bottom Layer w0.254: R18.1 v1(63.2,48.4)
NetR19_1: R19.1 U3.21 | length 6.9
  Top Layer w0.254: v1(64.4,46.8) 64.4,50.309 U3.21
  Bottom Layer w0.254: v1(64.4,46.8) 65.3,45.9 R19.1
RCAL0: R2.2 U1.32 | length 12.9
  Top Layer w0.254: R2.2 49.008,23.733 49.651,24.376 U1.32
RCAL1: R2.1 U1.33 | length 13.5
  Top Layer w0.254: R2.1 48.008,21.733 50.151,23.876 U1.33
RXD0: CN1.3 U3.37 | length 24
  Top Layer w0.254: v1(69.7,64.916) 69.97,64.916 70.553,64.333 72.588,64.333 U3.37
  Bottom Layer w0.254: v1(69.7,64.916) 78.647,64.916 79.174,64.389 83.461,64.389 88.2,59.65 CN1.3
SD_CS: LCD1.18 U3.17 | length 60.4
  Top Layer w0.254: LCD1.18 13.632,38.232 23.1,47.7 51.2,47.7 51.653,47.247 51.653,47.09 52.3,46.442 v1(52.3,46.3) ; U3.17 59.5,50.341 v1(59.5,46.8)
  Bottom Layer w0.254: v1(52.3,46.3) 58.725,46.3 59.225,46.8 v1(59.5,46.8)
TCH_CS: LCD1.11 U3.7 | length 63.9
  Top Layer w0.254: U3.7 55.176,60.5 v1(57.3,60.5)
  Bottom Layer w0.254: v1(57.3,60.5) 57.9,60.5 60.3,58.1 66.638,58.1 67.4,58.862 71.938,58.862 98.708,32.092 98.708,28.992 101.871,25.829 LCD1.11
TCH_IRQ: LCD1.14 U3.12 | length 67.5
  Top Layer w0.254: U3.12 55.316,54.4 v1(57.902,54.4)
  Bottom Layer w0.254: v1(57.902,54.4) 58.002,54.5 74.6,54.5 74.9,54.2 97.4,31.7 97.4,22.378 LCD1.14
TXD0: CN1.4 U3.36 | length 24.2
  Top Layer w0.254: v1(68.4,63.6) 68.675,63.6 69.18,63.095 U3.36
  Bottom Layer w0.254: v1(68.4,63.6) 75.181,63.6 75.462,63.881 81.969,63.881 86.2,59.65 CN1.4
U+: C1.2 D1.1 U+.0 | length 8.8
  Top Layer w0.254: C1.2 49.331,11.389 U+.0 52.135,5.453 D1.1
U-: C3.2 D1.3 U-.0 | length 17.7
  Top Layer w0.254: C3.2 43.947,14.192 U-.0 43.947,8.053 47.547,4.453 D1.3
USB_D+: R15.2 U3.23 | length 60.1
  Top Layer w0.508: R15.2 52.225,48.725 55.6,45.35 65.95,45.35 67.046,46.446 U3.23 U3.23@67.073,50.388
USB_D-: R14.2 U3.14 | length 42.7
  Top Layer w0.508: R14.2 53.786,50.63 54.821,51.665 U3.14
VBIAS: C12.1 U1.8 | length 6.2
  Top Layer w0.254: U1.8 59.124,25.876 61.75,23.25 62.891,23.25 C12.1
VBIAS_CAP: C8.2 U1.31 | length 5.3
  Top Layer w0.254: C8.2@45.864,25.4 45.864,25.349 46.337,24.876 U1.31
VREF_1V8: C6.2 U1.43 | length 4
  Top Layer w0.254: U1.43 54.69,19.835 54.85,19.675 C6.2
VREF_2V5: C4.2 U1.4 | length 8.6
  Top Layer w0.254: U1.4 58.262,23.876 58.39,23.748 58.43,23.748 59.525,22.653 59.525,20.5 61.275,18.75 62.801,18.75 C4.2
VZERO: C11.2 U1.9 | length 5.4
  Top Layer w0.254: U1.9 62.514,26.376 63.009,25.881 C11.2
XTAL0: C13.1 U1.12 Y1.2 | length 27.1
  Top Layer w0.254: U1.12 61.901,27.876 71.653,37.628 Y1.2 75.38,41.643 74.364,42.659 C13.1
XTAL1: C14.1 U1.11 Y1.1 | length 23.5
  Top Layer w0.254: U1.11 62.401,27.376 63.103,28.078 Y1.1 75.38,26.328 74.237,25.185 C14.1
pads on no net: J1.4 U1.1 U1.2 U1.3 U1.7 U1.10 U1.24 U1.27 U1.28 U1.34 U1.35 U1.37 U1.40 U1.45 U1.48 U3.8 U3.9 U3.10 U3.11 U3.13 U3.16 U3.22 U3.24 U3.25 U3.26 U3.28 U3.33 U3.34 U3.35

## Polygon pours and split planes (outlines as drawn)
GND on Bottom Layer "GND_L02_P000" (solid, pour order 0): 0,69 110,69 110,0 0,0
GND on Top Layer "GND_L01_P001" (solid, pour order 1): 0,69 110,69 110,0 0,0

## Text inside footprints (layer, text, board x,y; h text height)
U3: Mechanical 13 "ANTENNA" at 59.371,72.415 h1.27